# Altium PCB Car-PCB1.PcbDoc (part 1 of 4)
Units mil, origin at the board's own origin, x right, y up, seen from the top; angles counter-clockwise.
Board outline 2206 x 4474.17 mil, 4 copper layers (L1_Top, L2_GND, L3_PWR, L4_BOT), stack 60.912 mil thick; 163 components, 139 nets, 610 pads, 297 vias.
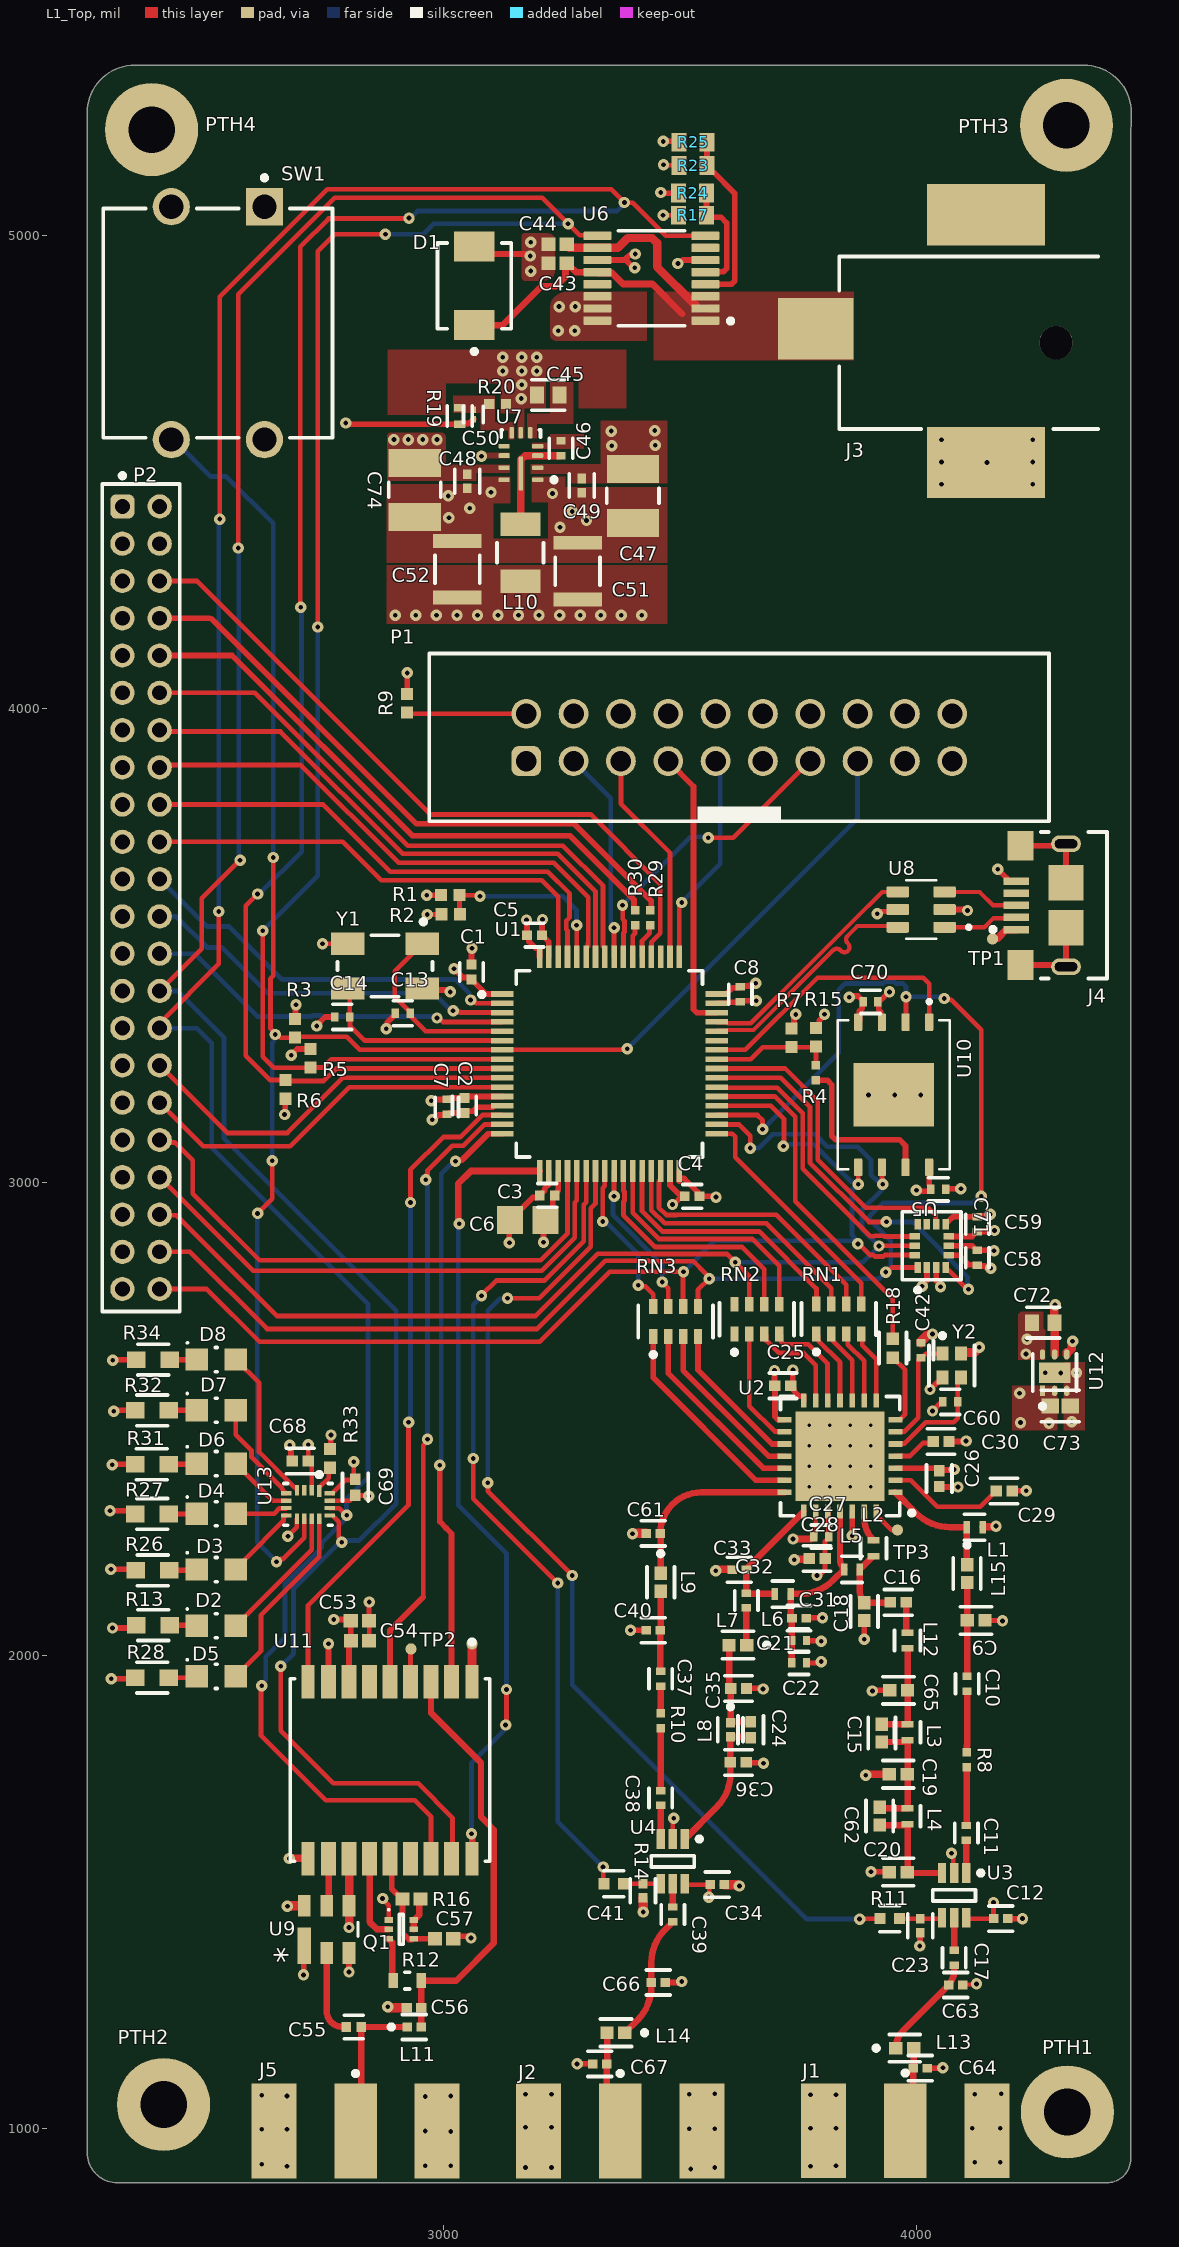
[diagram p0: L1_Top view]
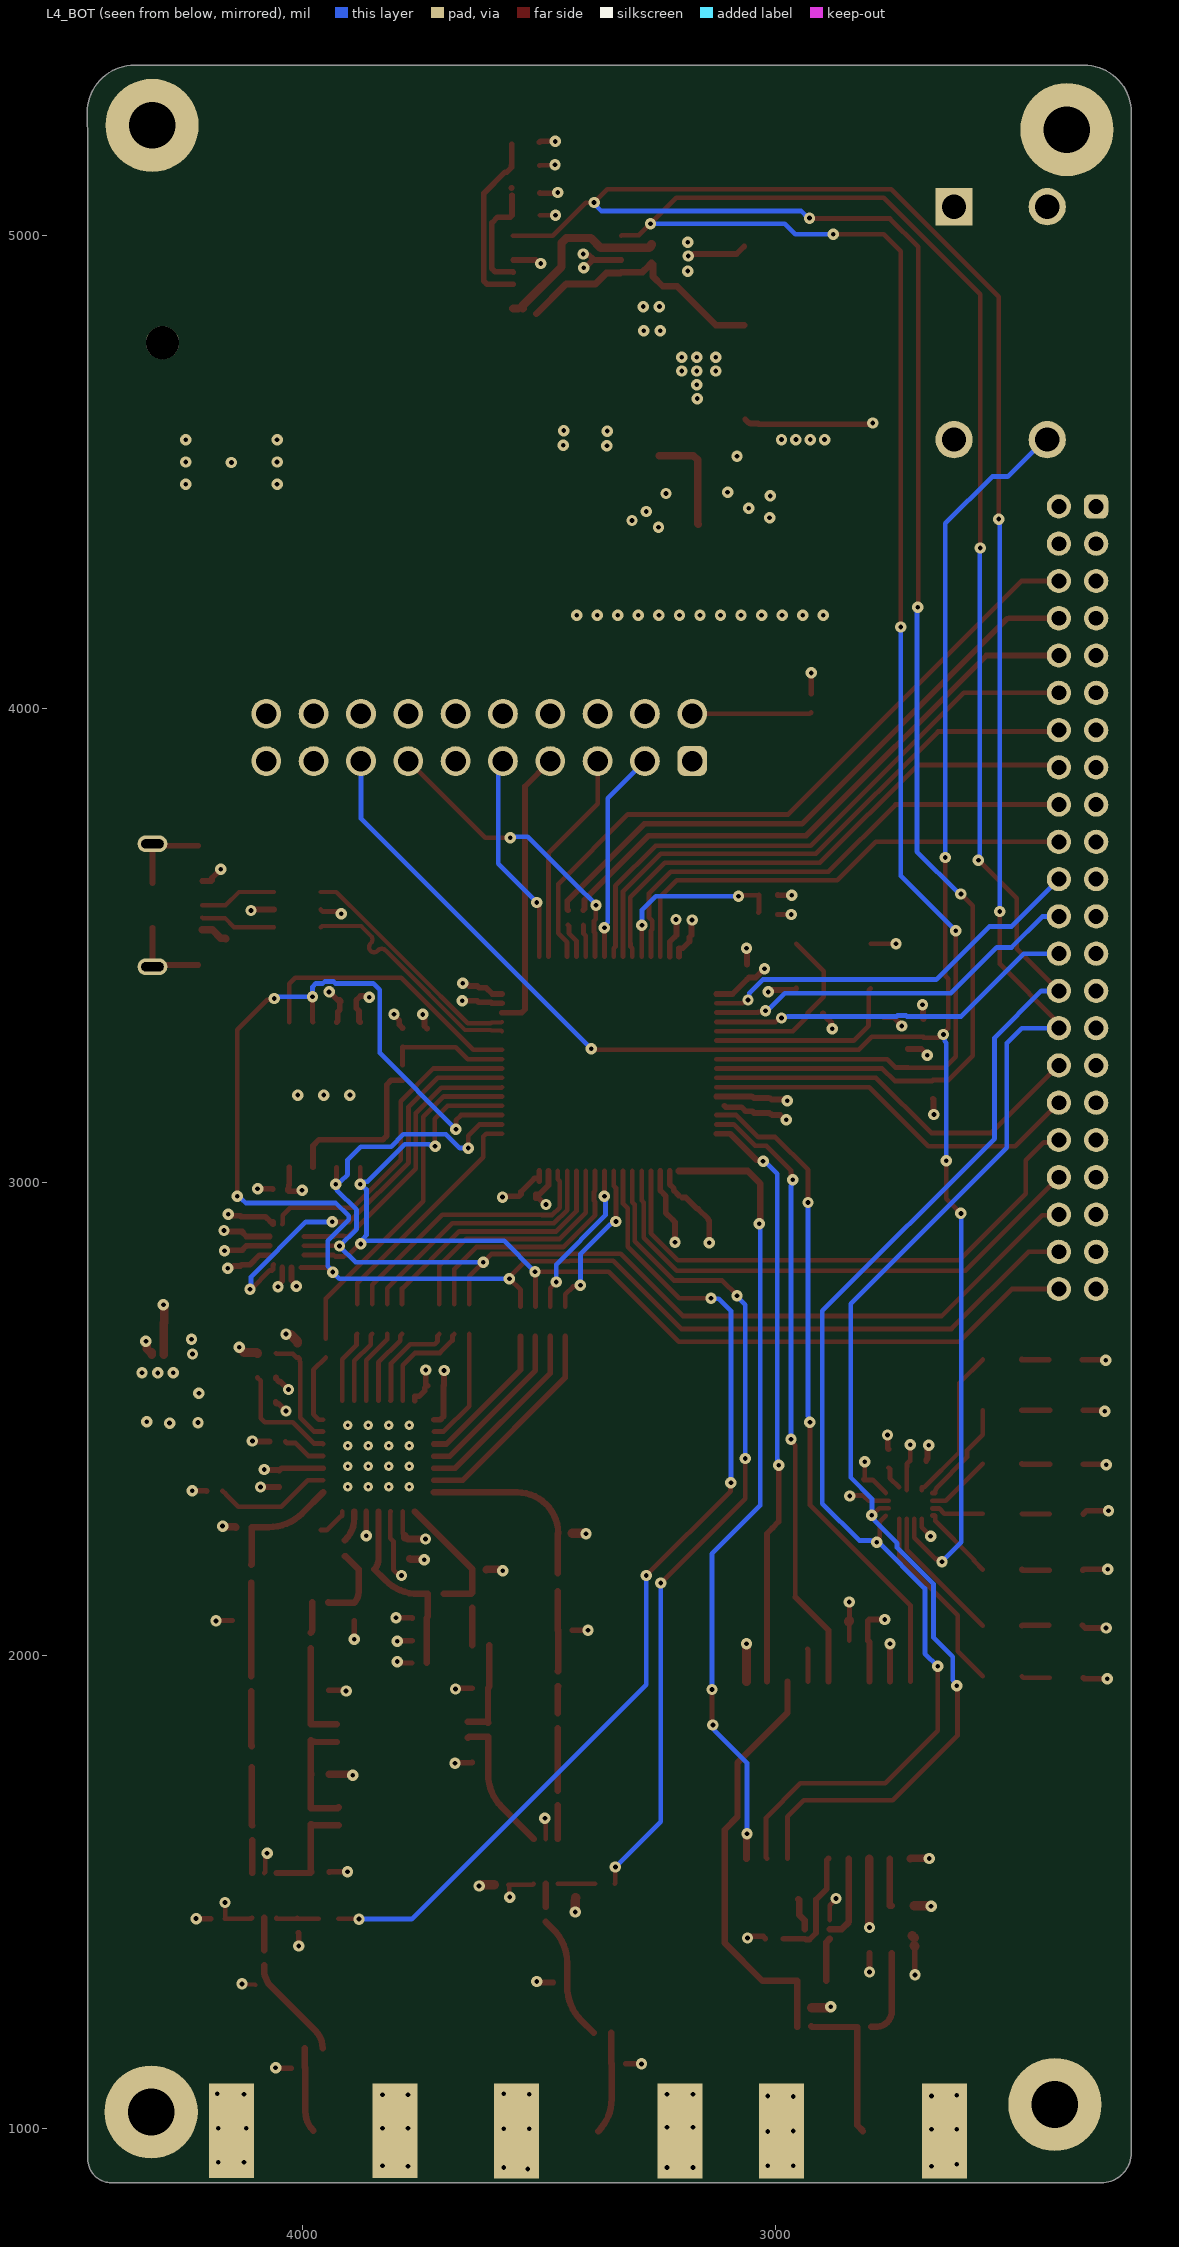
[diagram p1: L4_BOT view, seen from below]
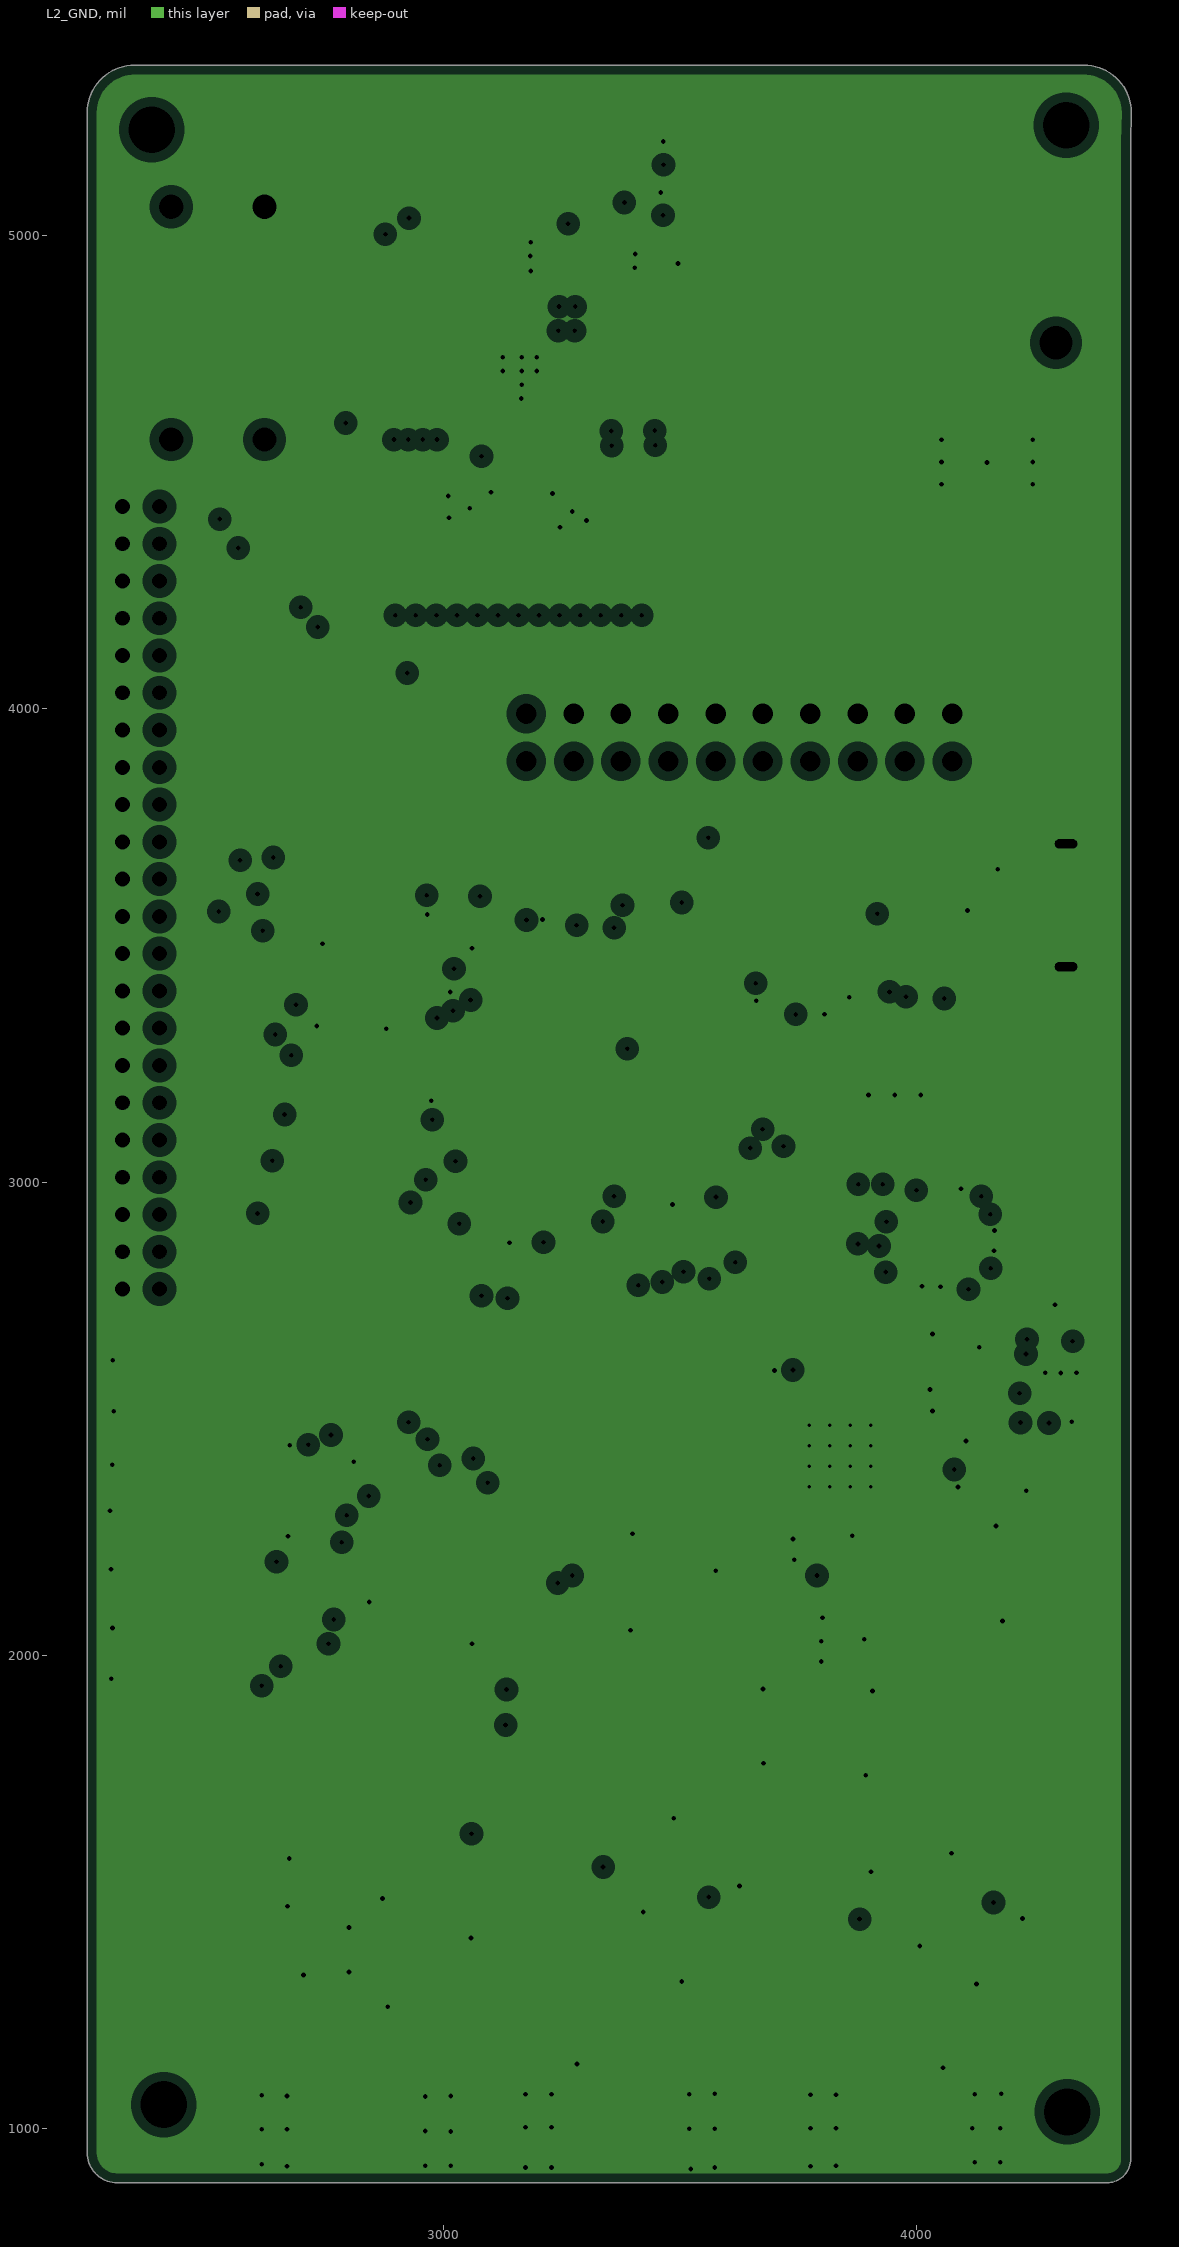
[diagram p2: L2_GND, clearances drawn from the general rule]
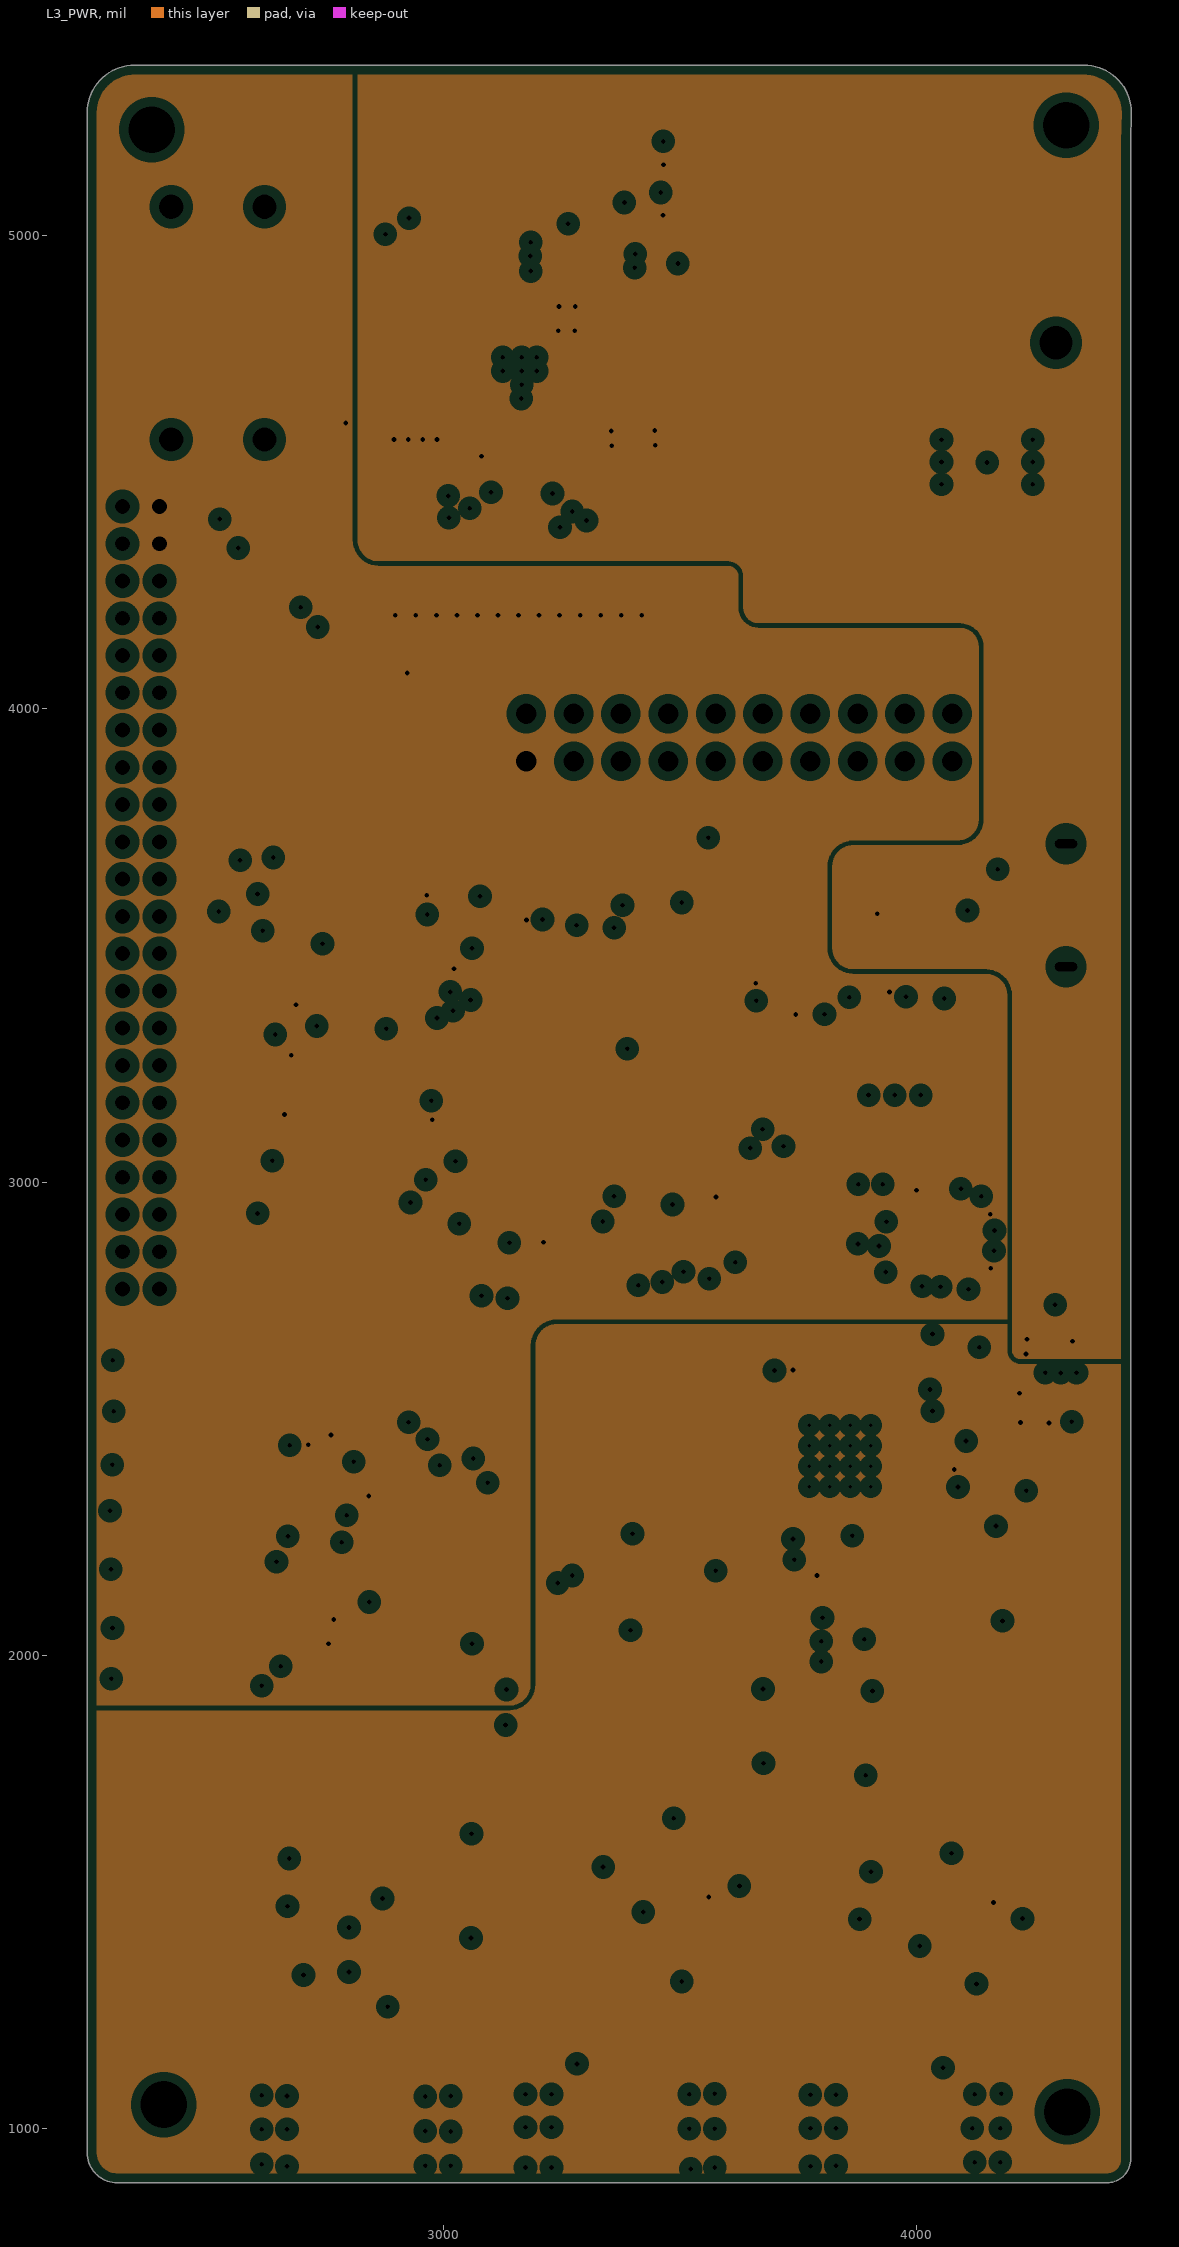
[diagram p3: L3_PWR, clearances drawn from the general rule]
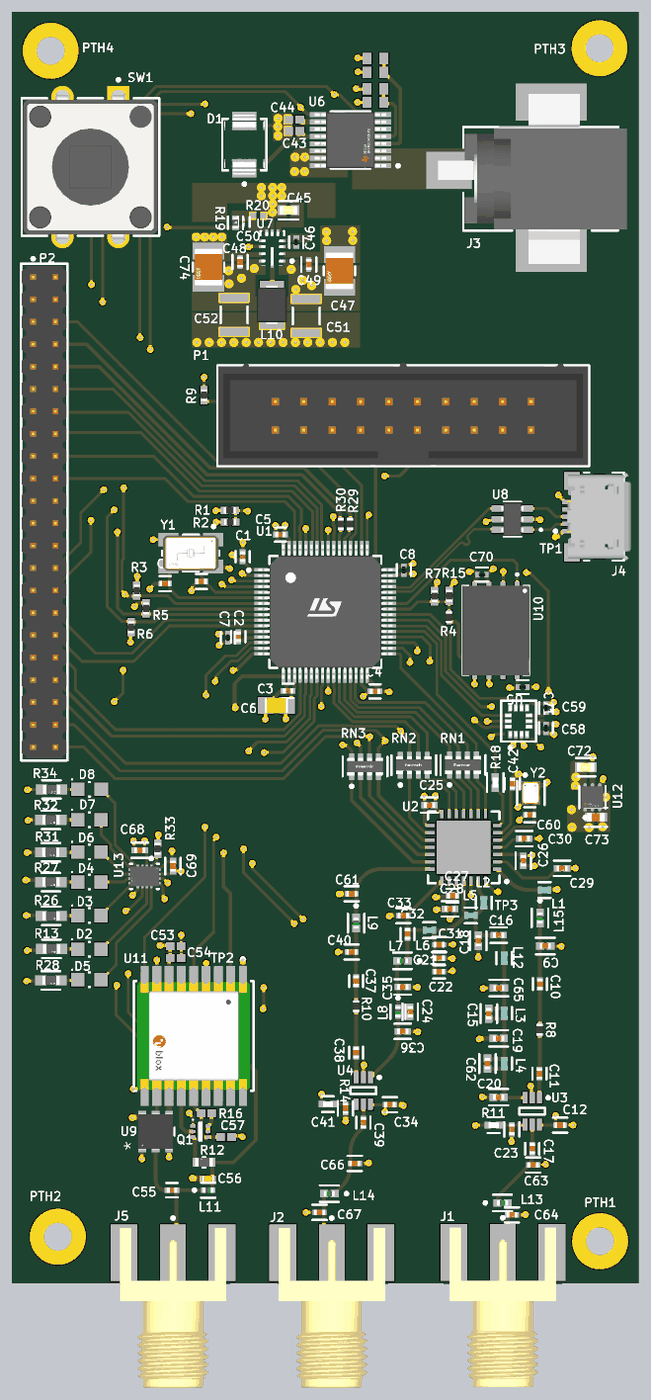
[diagram p6: 3D render of the assembled board from above, using the file's embedded part models]

## Layer stack, top to bottom
Top Solder: solder mask 0.4, Solder Resist, Dk 3.5
L1_Top: signal copper 1.378
Dielectric 2: prepreg 8.2, PP-022, Dk 4.7
L2_GND: plane copper 1.378, net GND
Dielectric 1: core 39, Core-042, Dk 4.6
L3_PWR: plane copper 1.378, net (Multiple Nets)
Dielectric 3: prepreg 8.2, PP-022, Dk 4.7
L4_BOT: signal copper 1.378
Bottom Solder: solder mask 0.4, Solder Resist, Dk 3.5

## Board outline
2311.17,885.83 cw(c2311.19,948.98) 2248.03,949 2248.03,5191 2248,5260 cw(c2348,5260) 2348,5360 4354,5360 cw(c4354,5260) 4454,5260 4452.76,5198 4452.76,935.83 cw(c4402.76,935.82) 4402.76,885.83

## Design rules (kind name [scope] priority, off if disabled: settings)
BoardOutlineClearance [All] p1: gap=20 ignorepadtopadclearanceinfootprint=FALSE
Clearance [All] p1: gap=3 ignorepadtopadclearanceinfootprint=TRUE
DiffPairsRouting DiffPairsRouting_1 [InDifferentialPair('USB')] p1: maxlimit=5 minlimit=5 mostfreqgap=5 toplayer_minwidth=8.9 toplayer_maxwidth=8.9 toplayer_prefwidth=8.9 bottomlayer_minwidth=8.9 bottomlayer_maxwidth=8.9 bottomlayer_prefwidth=8.9 impedanceprofiledriven=TRUE impedanceprofileid={67D3D440-86B2-471F-BC9C-9AFB41C58880} impedanceprofilevalue=90.000000 maxuncoupledlength=500
DiffPairsRouting [All] p2: maxlimit=5 minlimit=5 mostfreqgap=5 toplayer_minwidth=8.9 toplayer_maxwidth=8.9 toplayer_prefwidth=8.9 bottomlayer_minwidth=8.9 bottomlayer_maxwidth=8.9 bottomlayer_prefwidth=8.9 impedanceprofiledriven=TRUE impedanceprofileid={67D3D440-86B2-471F-BC9C-9AFB41C58880} impedanceprofilevalue=90.000000 maxuncoupledlength=500
Height [All] p1 off: minheight=0 maxheight=1000 prefheight=500
MatchedLengths MatchedLengths_1 [InNetClass('USB-1')] p1: tolerance=0.25 checknetsindiffpair=FALSE checkdiffpairvsdiffpair=TRUE checkxsignals=TRUE checkothers=TRUE
MinimumSolderMaskSliver [All] p1: minsoldermaskwidth=5.75
PlaneClearance [All] p1: clearance=20
PlaneConnect [All] p1: planeconnectstyle=Direct reliefexpansion=20 reliefentries=4 reliefconductorwidth=10 reliefairgap=10
PolygonConnect [All] p1: connectstyle=Direct reliefconductorwidth=10 reliefentries=4 polygonreliefangle="90 Angle" airgapwidth=10
RoutingVias [All] p1: holewidth=10 width=24 viastyle="Through Hole" minholewidth=10 minwidth=24 maxholewidth=10 maxwidth=24
SolderMaskExpansion [All] p1: expansion=4 istentingtop=FALSE
SupplyNets "Schematic Supply Nets" [InNet('+3V3')] p1: voltage=0.000
SupplyNets "Schematic Supply Nets_6" [InNet('+3V3_RF')] p2: voltage=0.000
SupplyNets "Schematic Supply Nets_5" [InNet('PWR_JACK')] p3: voltage=0.000
SupplyNets "Schematic Supply Nets_4" [InNet('+5V')] p4: voltage=0.000
SupplyNets "Schematic Supply Nets_3" [InNet('VCC_RF')] p5: voltage=0.000
SupplyNets "Schematic Supply Nets_1" [InNet('GND')] p6: voltage=0.000
Width LoRa [InNetClass('50ohm')] p1: maxlimit=13.64 minlimit=13.64 preferedwidth=13.64 impedanceprofiledriven=TRUE impedanceprofileid={B11F73B4-7360-41F1-84F0-BF905DB8C13B} impedanceprofilevalue=50.000000 minimp=50.000000 maximp=50.000000 favimp=50.000000
Width [All] p2: maxlimit=20 minlimit=8 preferedwidth=10 minimp=50.000000 maximp=50.000000 favimp=50.000000
25 further rules are at their usual default settings.

## Classes and differential pairs
net class USB90: NetJ4_2 NetJ4_3
net class 50ohm: NetC9_1 NetC10_2 NetC11_1 NetC11_2 NetC15_1 NetC15_2 NetC16_1 NetC16_2 NetC17_1 NetC17_2 NetC20_1 NetC21_1 NetC24_1 NetC24_2 NetC32_1 NetC32_2 NetC37_1 NetC37_2 NetC38_1 NetC38_2 NetC39_1 NetC39_2 NetC55_1 NetC55_2 NetC61_1 NetC64_1 NetC67_1 NetL1_2 NetL2_1 NetU9_5
net class N000-1_[2..1]: N000-1_1 N000-1_2
net class GPIO_[7..0]: GPIO_0 GPIO_1 GPIO_2 GPIO_3 GPIO_4 GPIO_5 GPIO_6 GPIO_7
component class USB: J4 PTH1 PTH2 PTH3 PTH4 TP1 U8
component class Regulator: C45 C46 C47 C48 C49 C50 C51 C52 C72 C73 C74 D5 L10 R19 R20 R28 U7 U12
component class PMON: C43 C44 D1 D4 J3 R17 R23 R24 R25 R27 U6
component class MCU: C1 C2 C3 C4 C5 C6 C7 C8 C13 C14 C68 C69 P1 R1 R2 R3 R5 R6 R9 R33 SW1 U1 U13 Y1
component class LoRa_XCVR: C9 C10 C11 C12 C15 C16 C17 C18 C19 C20 C21 C22 C23 C24 C25 C26 C27 C28 C29 C30 C31 C32 C33 C34 C35 C36 C37 C38 C39 C40 C41 C42 C60 C61 C62 C63 C64 C65 C66 C67 D3 J1 J2 L1 L2 L3 L4 L5 L6 L7 L8 L9 L12 L13 L14 L15 R8 R10 R11 R14 R18 R26 RN1 RN2 RN3 TP3 U2 U3 U4 Y2
component class IMU: C58 C59 D7 R32 U10
component class Header: D8 P2 R29 R30 R34
component class GPS: C53 C54 C55 C56 C57 D6 J5 L11 Q1 R12 R16 R31 TP2 U9 U11
component class Flash: C70 C71 D2 R4 R7 R13 R15 U5
differential pair USB: +USB_P -USB_N

## Components (designator, comment, footprint, x,y, rotation, side; value= is the part's Value field where it differs from the comment)
C1 "100nF" FP-C0402-BB-MFG 3060,3444 r90 top value="0.10 μF"
C2 "100nF" FP-C0402-BB-MFG 3045,3162 r90 top value="0.10 μF"
C3 "100nF" FP-C0402-BB-MFG 3220,2972 r180 top value="0.10 μF"
C4 "100nF" FP-C0402-BB-MFG 3526,2970 r180 top value="0.10 μF"
C5 "100nF" FP-C0402-BB-MFG 3193,3522 r0 top value="0.10 μF"
C6 "4.7uF" CAPC2013X135X45LL10T25 3179,2920 r0 top
C7 "1uF" FP-GRM15-MFG 3008,3159 r270 top value=0.10μF
C8 "1uF" FP-GRM15-MFG 3628,3397 r90 top value=0.10μF
C9 "6p8F" FP-GJM155-0_05-IPC_A 4126,2074 r0 top
C10 "47pF" FP-GJM155-0_05-MFG 4107,1940 r270 top
C11 "47pF" FP-GJM155-0_05-MFG 4105.32,1625 r270 top
C12 "1nF" FP-GRM155-0_05-IPC_C 4178.15,1443.9 r0 top
C13 "10pF" FP-GRT155-0_05-MFG 2915,3357 r180 top
C14 "10pF" FP-GRT155-0_05-MFG 2786.77,3349.14 r180 top
C15 "2.7pF" FP-GJM155-0_05-IPC_A 3927,1836 r270 top
C16 "18pF" FP-GJM155-0_05-IPC_B 3961.75,2112.2 r0 top
C17 "47pF" FP-GJM155-0_05-MFG 4079.72,1361.22 r270 top
C18 "15pF" FP-GJM155-0_05-IPC_A 3889.76,2092.52 r270 top
C19 "15pF" FP-GJM155-0_05-IPC_A 3961.61,1749.02 r180 top
C20 "6p8F" FP-GJM155-0_05-IPC_A 3961.61,1542.32 r180 top
C21 "47pF" FP-GJM155-0_05-MFG 3751.97,2031.5 r0 top
C22 "47pF" FP-GJM155-0_05-MFG 3751.97,1984.25 r0 top
C23 "1nF" FP-GRM155-0_05-IPC_C 4008,1429 r270 top
C24 "1.2pF" FP-GJM155-0_05-IPC_B 3650,1843 r270 top
C25 "100nF" FP-GRM155-0_05-IPC_B 3718,2570 r180 top
C26 "100nF" FP-GRM155-0_05-IPC_B 4048.23,2373.88 r270 top
C27 "47pF" FP-GJM155-0_05-MFG 3799.21,2250.98 r180 top
C28 "100nF" FP-GRM155-0_05-IPC_B 3790.21,2204.72 r180 top
C29 "100nF" FP-GRM155-0_05-IPC_B 4185.18,2347.44 r0 top
C30 "100nF" FP-GRM155-0_05-IPC_B 4052,2452 r0 top
C31 "10nF" FP-GRM155-0_05-IPC_C 3751.97,2078.74 r0 top
C32 "33pF" FP-GJM155-0_05-MFG 3640.75,2116.14 r270 top
C33 "1.5pF" FP-GJM155-0_05-IPC_C 3625.98,2181.1 r180 top
C34 "1nF" FP-GRM155-0_05-IPC_C 3578.88,1515.75 r0 top
C35 "4p7F" FP-GJM155-0_05-IPC_B 3624.13,1930.29 r0 top
C36 "1.8pF" FP-GJM155-0_05-IPC_B 3623.87,1774 r0 top
C37 "47pF" FP-GJM155-0_05-MFG 3459.65,1950.79 r270 top
C38 "47pF" FP-GJM155-0_05-MFG 3459.65,1698.82 r270 top
C39 "47pF" FP-GJM155-0_05-MFG 3485.24,1452.76 r270 top
C40 "3.3pF" FP-GJM155-0_05-IPC_C 3443.9,2053.15 r180 top
C41 "1nF" FP-GRM155-0_05-IPC_C 3422,1503 r90 top
C42 "10pF" FP-GRT155-0_05-MFG 4009.68,2645.17 r90 top
C43 "100nF" CAPC1005X55X25ML05T10 3242,4942 r0 top
C44 "100nF" CAPC1005X55X25ML05T10 3242,4982 r0 top
C45 "1uF" FP-C0603C105K4PACTU-MFG 3222,4663 r0 top
C46 "100nF" FP-GRM15-MFG 3249,4551 r270 top value=0.10μF
C47 "4.7uF" FP-1210-L_3_3_0_4-W_2_5_0-IPC_B 3401,4450 r270 top
C48 "220nF" FP-GRM155-0_05-IPC_C 3051,4481 r270 top
C49 "220nF" FP-GRM155-0_05-IPC_C 3293,4472 r270 top
C50 "20pF" FP-GJM022-0_02-IPC_B 3064,4621.95 r270 top
C51 "22uF" MURA-1210_H_2.7_L 3284,4291 r270 top
C52 "22uF" MURA-1210_H_2.7_L 3030,4295 r270 top
C53 "100nF" CAPC1005X55X25ML05T10 2824,2073 r0 top
C54 "100nF" CAPC1005X55X25ML05T10 2824.41,2031.5 r0 top
C55 "47pF" FP-C0402-BB-MFG 2811.25,1215 r180 top value="47 pF"
C56 "10nF" CAPC1005X55X25LL05T10 2938.58,1255.91 r0 top
C57 "100nF" CAPC1005X55X25ML05T10 3001.97,1401.57 r0 top
C58 "100nF" FP-GRM15-MFG 4128.57,2840.47 r270 top value=0.10μF
C59 "100nF" FP-GRM15-MFG 4128.57,2911.33 r90 top value=0.10μF
C60 "10pF" FP-GRT155-0_05-MFG 4071.69,2535.92 r180 top
C61 "3.3pF" FP-GJM155-0_05-IPC_C 3443.9,2257.87 r180 top
C62 "2.7pF" FP-GJM155-0_05-IPC_A 3922.24,1660.43 r270 top
C63 "3.3pF" FP-GJM155-0_05-IPC_C 4083.35,1303.65 r0 top
C64 "3.3pF" FP-GJM155-0_05-IPC_C 4008,1128 r0 top
C65 "6p8F" FP-GJM155-0_05-IPC_A 3962.46,1926.18 r180 top
C66 "3.3pF" FP-GJM155-0_05-IPC_C 3454.72,1309.06 r0 top
C67 "3.3pF" FP-GJM155-0_05-IPC_C 3331,1137 r180 top
C68 "100nF" FP-GRM155-0_05-IPC_B 2698.13,2411 r180 top
C69 "100nF" FP-GRM155-0_05-IPC_B 2814.59,2355.34 r90 top
C70 "100nF" FP-GRM15-MFG 3903,3381 r0 top value=0.10μF
C71 "100nF" FP-GRM15-MFG 4046,2985 r0 top value=0.10μF
C72 "1uF" FP-C0603C105K4PACTU-MFG 4268,2703 r0 top
C73 "2.2uF" FP-C1608-080-0_1-IPC_C 4304,2527 r180 top
C74 "4.7uF" FP-1210-L_3_3_0_4-W_2_5_0-IPC_B 2940,4462.91 r270 top
D1 "SMBJ5.0A-TR" FP-SMB-MFG 3066,4894 r90 top
D2 "LTST-C170KGKT" LTST-LTST-C170KGKT-2_V 2520.37,2062.72 r0 top
D3 "LTST-C170KGKT" LTST-LTST-C170KGKT-2_V 2520.37,2181.49 r0 top
D4 "LTST-C170KGKT" LTST-LTST-C170KGKT-2_V 2520.37,2299.39 r0 top
D5 "LTST-C170KGKT" LTST-LTST-C170KGKT-2_V 2520.37,1955.76 r0 top
D6 "LTST-C170KGKT" LTST-LTST-C170KGKT-2_V 2520.37,2405.25 r0 top
D7 "LTST-C170KGKT" LTST-LTST-C170KGKT-2_V 2520.37,2518.12 r0 top
D8 "LTST-C170KGKT" LTST-LTST-C170KGKT-2_V 2520.75,2625.2 r0 top
J1 "142-0701-801" CINC-142-0701-801_V 3976.38,996.06 r270 top
J2 "142-0701-801" CINC-142-0701-801_V 3374.02,995.08 r270 top
J3 "RASM722PTR13X" FP-RASM722PTR13X-MFG 4127.67,4773.65 r90 top
J4 "10118193-0001LF" FCI-10118193-0001LF-5_V 4263,3585 r90 top
J5 "142-0701-801" CINC-142-0701-801_V 2814.96,995.08 r270 top
L1 "18nH" FP-LQW15AN_00-W0_6-0_1-MFG 4123,2271 r180 top
L2 "2.2nH" FP-LQW15AN_00-W0_6-0_1-MFG 3909.45,2226.38 r270 top
L3 "12nH" FP-LQW15AN_00-W0_6-0_1-MFG 3981.3,1837.6 r270 top
L4 "15nH" FP-LQW15AN_00-W0_6-0_1-MFG 3981.3,1660.43 r270 top
L5 "33nH" FP-LQW15AN_00-W0_5-0_1-MFG 3864,2182 r0 top
L6 "33nH" FP-LQW15AN_00-W0_5-0_1-MFG 3717.52,2129.92 r0 top
L7 "10nH" FP-LQG15HH_02-IPC_A 3623,2022 r180 top
L8 "6.2nH" FP-LQG15HH_02-IPC_C 3607,1843 r270 top
L9 "10nH" FP-LQG15HH_02-IPC_A 3459.65,2154.67 r270 top
L10 "CM322522-100KL" BOUR-CM322522_V 3163,4330 r270 top
L11 "27nH" FP-LQG15HH_02-IPC_C 2939,1215 r0 top
L12 "15nH" FP-LQW15AN_00-W0_6-0_1-MFG 3981.3,2031.5 r270 top
L13 "10nH" FP-LQG15HH_02-IPC_A 3975.39,1170.28 r0 top
L14 "10nH" FP-LQG15HH_02-IPC_A 3365.16,1202.76 r180 top
L15 "10nH" FP-LQG15HH_02-IPC_A 4107,2173 r270 top
P1 "61202021621" 61202021621 3625.59,3939.76 r0 top
P2 "62004421121" 62004421121 2361.63,3600.97 r270 top
PTH1 "PTH-M2D5X5" PTH-M2D5X5 4318.9,1035.43 r0 top
PTH2 "PTH-M2D5X5" PTH-M2D5X5 2409.45,1051.18 r0 top
PTH3 "PTH-M2D5X5" PTH-M2D5X5 4317,5233 r0 top
PTH4 "PTH-M2D5X5" PTH-M2D5X5 2384,5224 r0 top
Q1 "NTZD3155CT1G" ONSC-SOT-563-6-463A-01_V 2911.42,1421.26 r0 top
R1 "Resistor 10k +/-1% 0402 63 mW" RESC1005X40X25ML05T05 3015,3607 r180 top value=10k
R2 "Resistor 10k +/-1% 0402 63 mW" RESC1005X40X25ML05T05 3016,3566 r180 top value=0
R3 "Resistor 10k +/-1% 0402 100 mW" RESC1005X40X25ML05T05 2687,3325 r90 top value=10k
R4 "0" RESC1005X40X25LL05T05 3787,3231 r270 top
R5 "Resistor 10k +/-1% 0402 100 mW" RESC1005X40X25ML05T05 2720,3262 r90 top value=4.7K
R6 "Resistor 10k +/-1% 0402 100 mW" RESC1005X40X25ML05T05 2667,3196 r270 top value=4.7K
R7 "Resistor 10k +/-1% 0402 100 mW" RESC1005X40X25ML05T05 3736,3305 r90 top value=10k
R8 "0R" RESC1005X40X25LL05T05 4106.3,1779.53 r270 top
R9 "Resistor 10k +/-1% 0402 63 mW" RESC1005X40X25ML05T05 2924,4012 r90 top value=0
R10 "0R" RESC1005X40X25LL05T05 3460,1862 r270 top
R11 "1k" FP-CRCW0402-e3-MFG 3943.9,1443.9 r0 top
R12 "10R" FP-ESR03-MFG 2924,1313 r0 top
R13 "470" FP-CPF0603-MFG 2387,2064 r180 top value=470Ω
R14 "1k" FP-CRCW0402-e3-MFG 3360.24,1517.72 r0 top
R15 "Resistor 10k +/-1% 0402 100 mW" RESC1005X40X25ML05T05 3787.76,3306.11 r270 top value=0
R16 "100k" RESC1005X40X25ML10T10 2933,1485 r0 top
R17 "10k" RESC1608X55X25ML10T15 3527,5043 r180 top
R18 "100R" FP-CRCW0402-e3-IPC_A 3950,2649.23 r90 top
R19 "100k" FP-CRCW0402-C-e3-MFG 3035,4619 r270 top
R20 "43.2k" RESC1005X40X25NL05T05 3115,4644 r180 top
R23 "10k" RESC1608X55X25ML10T15 3528,5148 r180 top
R24 "0R" RESC1608X55X25ML10T15 3527,5090 r0 top
R25 "0R" RESC1608X55X25ML10T15 3528,5197 r0 top
R26 "470" FP-CPF0603-MFG 2386,2180 r180 top value=470Ω
R27 "470" FP-CPF0603-MFG 2385,2299 r180 top value=470Ω
R28 "470" FP-CPF0603-MFG 2385,1953 r180 top value=470Ω
R29 "0" RESC1005X40X25LL05T05 3438,3559 r270 top
R30 "0" RESC1005X40X25LL05T05 3406,3559 r270 top
R31 "470" FP-CPF0603-MFG 2384.57,2404 r180 top value=470Ω
R32 "470" FP-CPF0603-MFG 2385,2518 r180 top value=470Ω
R33 "Resistor 10k +/-1% 0402 100 mW" RESC1005X40X25ML05T05 2760.83,2416.34 r270 top value=10k
R34 "470" FP-CPF0603-MFG 2387,2625 r180 top value=470Ω
RN1 "100R" FP-EXB38V-MFG 3836,2711 r0 top
RN2 "100R" FP-EXB38V-MFG 3662.76,2710.5 r0 top
RN3 "100R" FP-EXB38V-MFG 3491.25,2705.5 r0 top
SW1 "FSM103" FP-FSM103-MFG 2524,4815 r90 top
TP1 "TPAD6R" TP06R 4161,3514 r0 top
TP2 "TPAD6R" TP06R 2932.09,2013.78 r0 top
TP3 "TPAD6R" TP06R 3960,2265 r90 top
U1 "STM32L476RGT6TR" FP-LQFP64-5W-MFG 3351.4,3250 r0 top
U2 "SX1276IMLTRT" SMTC-QFN-28_V 3838.58,2421.26 r180 top
U3 "4259-63" PERE-SC-70-6_M 4079.72,1493.11 r270 top
U4 "4259-63" PERE-SC-70-6_M 3485.24,1564.96 r270 top
U5 "" SON127P600X800X80-9N 3952,3184.65 r270 top
U6 "INA260AIPWR" FP-PW0016A-MFG 3440,4910 r180 top
U7 "LMR36015BRNXT" FP-RNX0012B-MFG 3164.32,4528.38 r180 top
U8 "USBLC6-2SC6" SOT95P280X145-6N 4010,3576 r180 top
U9 "B39162B3913U410" B39162B3913U410_QUA 2753.94,1421.26 r90 top
U10 "LSM6DSOXTR" FP-LGA-14L-DM00249496-MFG 4032.11,2865.57 r90 top
U11 "MAX-M10S-00B" FP-MAX-M10S-00B-MFG 2887.8,1757.87 r270 top
U12 "TLV76733DRVR" FP-DRV0006A-IPC_C 4292,2597.51 r90 top
U13 "FXL6408UMX" FP-523BF-MFG 2714.57,2319.15 r270 top
Y1 "ABM3B-16.000MHZ-10-B-1-U-T" FP-ABM3B-MFG 2877.32,3456.59 r180 top
Y2 "32MHz" FP-ABM11-MFG 4074.65,2612.69 r270 top

## Footprints (in the part's own frame and the unit in brackets; to place one, negate y for a bottom-side part, rotate by r counter-clockwise, add the part's x,y. Pads: shape width x height; smd on the part's side, far side on the other; paste and mask are expansions set on the pad)
61202021621 [mm] "20 pins, straight, gold plating"
  rrect50% 1.6x1.6 hole 1.1: 1(-11.43,-1.27)
  round 1.6 hole 1.1: 2(-11.43,1.27) 3(-8.89,-1.27) 4(-8.89,1.27) 5(-6.35,-1.27) 6(-6.35,1.27) 7(-3.81,-1.27) 8(-3.81,1.27) 9(-1.27,-1.27) 10(-1.27,1.27) 11(1.27,-1.27) 12(1.27,1.27) 13(3.81,-1.27) 14(3.81,1.27) 15(6.35,-1.27) 16(6.35,1.27) 17(8.89,-1.27) 18(8.89,1.27) 19(11.43,-1.27) 20(11.43,1.27)
  silkscreen extent -16.63,-4.5 16.63,4.5, body extent -16.53,-4.42 16.53,4.75, height 9.13
62004421121 [mm] "2.00 mm THT Dual Pin Header, 44p"
  rrect50% 1.3x1.3 hole 0.8: 1(-21,-1)
  round 1.3 hole 0.8: 2(-21,1) 3(-19,-1) 4(-19,1) 5(-17,-1) 6(-17,1) 7(-15,-1) 8(-15,1) 9(-13,-1) 10(-13,1) 11(-11,-1) 12(-11,1) 13(-9,-1) 14(-9,1) 15(-7,-1) 16(-7,1) 17(-5,-1) 18(-5,1) 19(-3,-1) 20(-3,1) 21(-1,-1) 22(-1,1) 23(1,-1) 24(1,1) 25(3,-1) 26(3,1) 27(5,-1) 28(5,1) 29(7,-1) 30(7,1) 31(9,-1) 32(9,1) 33(11,-1) 34(11,1) 35(13,-1) 36(13,1) 37(15,-1) 38(15,1) 39(17,-1) 40(17,1) 41(19,-1) 42(19,1) 43(21,-1) 44(21,1)
  silkscreen extent -22.77,-2.07 22.2,2.07, body extent -22,-2 22,2, height 6.05
B39162B3913U410_QUA [mil]
  rect 77x28 smd paste+0 mask+0: 1(-34.5,47.24)
  rect 46x27 smd paste+0 mask+0: 2(-50,0) 3(-50,-47.24) 4(50,-47.24) 5(50,0) 6(50,47.24)
  silkscreen extent -15,-66 15,-66, body extent -63,-61 63,61, height 48
BOUR-CM322522_V [mm] "Inductor, 2-Leads, Body 3.2x2.5mm, Pitch 3.05mm"
  rect 1.25x2.15 smd: 1(-1.525,0) 2(1.525,0)
  silkscreen extent -0.54,-1.25 0.54,1.25, body extent -1.77,-1.35 1.77,1.35, height 2.4
CAPC1005X55X25LL05T10 [mm] "Chip Capacitor, 2-Leads, Body 1.05x0.55mm, IPC High Density"
  rect 0.56x0.52 smd: 1(-0.39,0) 2(0.39,0)
  body extent -0.53,-0.28 0.53,0.28, height 0.55
CAPC1005X55X25ML05T10 [mm] "Chip Capacitor, 2-Leads, Body 1.00x0.50mm, IPC Low Density"
  rect 0.76x0.72 smd: 1(-0.49,0) 2(0.49,0)
  body extent -0.53,-0.28 0.53,0.27, height 0.55
CAPC2013X135X45LL10T25 [mm] "Chip Capacitor, 2-Leads, Body 2.10x1.35mm, IPC High Density"
  rect 1.4x1.5 smd: 1(-0.95,0) 2(0.95,0)
  body extent -1.05,-0.67 1.05,0.67, height 1.35
CINC-142-0701-801_V [mil] "SMA Connector, 5-Leads, Body 14.275x9.525mm"
  rect 200x90 smd: 1(0,0)
  rect 200x95 smd: 2(0,172.5) 3(0,-172.5)
  rect 200x95 smd far side: 4(0,172.5)
  rect 200x95 smd far side mask+4: 5(0,-172.5)
  silkscreen extent -127,-5 -117,5, body extent -87,-187 475,188, height 171
FCI-10118193-0001LF-5_V [mm] "Micro, USB-B, 5-Leads, Body 7.86x5.05mm, Pitch 0.65 mm"
  rect 0.4x1.35 smd: 1(-1.3,1.325) 2(-0.65,1.325) 3(0,1.325) 4(0.65,1.325) 5(1.3,1.325)
  rect 1.6x1.4 smd: 6(-3.2,1.1) 7(3.2,1.1)
  rect 1.9x1.9 smd: 8(-1.2,-1.35) 9(1.2,-1.35)
  oval 0.9x1.6 hole 0.5 slot 1.2 at 90 deg: 10(-3.3,-1.35) 11(3.3,-1.35)
  silkscreen extent -3.93,-3.55 3.93,2.7, body extent -3.93,-4.16 3.93,1.5, height 2.83
FP-523BF-MFG [mm]
  rect 0.663x0.225 smd paste+0 mask+0: 1(-0.718,0.6)
  rect 0.563x0.225 smd paste+0 mask+0: 2(-0.768,0.2) 3(-0.768,-0.2) 4(-0.768,-0.6) 9(0.768,-0.6) 10(0.768,-0.2) 11(0.768,0.2) 12(0.768,0.6)
  rect 0.225x0.563 smd paste+0 mask+0: 5(-0.6,-1.168) 6(-0.2,-1.168) 7(0.2,-1.168) 8(0.6,-1.168) 13(0.6,1.168) 14(0.2,1.168) 15(-0.2,1.168) 16(-0.6,1.168)
  silkscreen extent -1.72,-1.3 1.12,1.3, body extent -1.15,-1.55 1.15,1.55, height 0.25
FP-1210-L_3_3_0_4-W_2_5_0-IPC_B [mil]
  rect 59.16x110.4 smd paste+0 mask+0: 1(-57.09,0) 2(57.09,0)
  silkscreen extent -16,-55 16,55, body extent -97,-65 97,65, height 10
FP-ABM3B-MFG [mm]
  rect 1.8x1.2 smd paste+0 mask+0: 1(-2,-1.2) 2(2,-1.2) 3(2,1.2) 4(-2,1.2)
  silkscreen extent -2.55,-2.5 2.55,1.65, body extent -3,-1.9 3,1.9, height 0.25
FP-ABM11-MFG [mm]
  rect 0.75x0.65 smd paste+0 mask+0: 1(-0.65,-0.5) 2(0.65,-0.5) 3(0.65,0.5) 4(-0.65,0.5)
  silkscreen extent -1.72,-1.22 1.07,1.22, body extent -1.17,-0.97 1.17,0.97, height 0.25
FP-C0402-BB-MFG [mm]
  rect 0.52x0.52 smd paste+0 mask+0: 1(-0.4,0) 2(0.4,0)
  silkscreen extent -0.5,-0.64 0.5,0.64, body extent -0.8,-0.4 0.8,0.4, height 0.25
FP-C0603C105K4PACTU-MFG [mm]
  rect 0.75x0.9 smd paste+0 mask+0: 1(-0.6,0) 2(0.6,0)
  silkscreen extent -0.87,-0.82 0.87,0.82, body extent -1.2,-0.6 1.2,0.6, height 0.25
FP-C1608-080-0_1-IPC_C [mil]
  rect 36.66x31.97 smd paste+0 mask+0: 1(-21.28,0) 2(21.28,0)
  silkscreen extent -40,-33 40,33, body extent -44,-22 44,22, height 10
FP-CPF0603-MFG [mm]
  rect 1x0.9 smd paste+0 mask+0: 1(-0.9,0) 2(0.9,0)
  silkscreen extent -0.82,-0.82 0.82,0.82, body extent -1.5,-0.55 1.5,0.55, height 0.25
FP-CRCW0402-C-e3-MFG [mm]
  rect 0.4x0.6 smd paste+0 mask+0: 1(-0.45,0) 2(0.45,0)
  silkscreen extent -0.55,-0.67 0.55,0.67, body extent -0.75,-0.4 0.75,0.4, height 0.25
FP-CRCW0402-e3-IPC_A [mil]
  rect 26.31x26.48 smd paste+0 mask+0: 1(-19.77,0) 2(19.77,0)
  silkscreen extent -33,-29 33,29, body extent -41,-21 41,21, height 10
FP-CRCW0402-e3-MFG [mm]
  rect 0.6x0.6 smd paste+0 mask+0: 1(-0.525,0) 2(0.525,0)
  silkscreen extent -0.53,-0.7 0.53,0.7, body extent -0.92,-0.4 0.92,0.4, height 0.25
FP-DRV0006A-IPC_C [mm]
  rect 0.556x0.292 smd paste+0 mask+0: 1(-0.978,0.65)
  rrect100% 0.556x0.292 smd paste+0 mask+0: 2(-0.978,0) 3(-0.978,-0.65) 4(0.978,-0.65) 5(0.978,0) 6(0.978,0.65)
  rect 1.1x1.7 smd paste-1000 mask+0: 7(0,0)
  silkscreen extent -1.93,-1.17 1,1.17, body extent -1.36,-1.1 1.36,1.1, height 0.25
FP-ESR03-MFG [mm]
  rect 0.5x0.8 smd paste+0 mask+0: 1(-0.75,0) 2(0.75,0)
  silkscreen extent -0.13,-0.45 0.13,0.45, body extent -1.1,-0.55 1.1,0.55, height 0.25
FP-EXB38V-MFG [mm]
  rect 0.45x0.8 smd paste+0 mask+0: 1(-1.2,-0.8) 2(-0.4,-0.8) 3(0.4,-0.8) 4(1.2,-0.8) 5(1.2,0.8) 6(0.4,0.8) 7(-0.4,0.8) 8(-1.2,0.8)
  silkscreen extent -2,-1.9 2,0.87, body extent -1.8,-1.3 1.8,1.3, height 0.25
FP-FSM103-MFG [mm]
  rect 2x2 hole 1.3 paste-2539.97 mask+0: 1(6.25,-2.5)
  round 2 hole 1.3 paste-2539.97 mask+0: 2(-6.25,-2.5) 3(6.25,2.5) 4(-6.25,2.5)
  silkscreen extent -6.15,-6.15 7.92,6.15, body extent -7.35,-6.25 7.35,6.25, height 0.25
FP-GJM022-0_02-IPC_B [mil]
  rect 14x10.29 smd paste+0 mask+0: 1(-9.95,0) 2(9.95,0)
  silkscreen extent -17,-21 17,21, body extent -23,-11 23,11, height 10
FP-GJM155-0_05-IPC_A [mil]
  rect 28.16x26.48 smd paste+0 mask+0: 1(-18.84,0) 2(18.84,0)
  silkscreen extent -33,-29 33,29, body extent -41,-21 41,21, height 10
FP-GJM155-0_05-IPC_B [mil]
  rect 24.23x22.54 smd paste+0 mask+0: 1(-16.87,0) 2(16.87,0)
  silkscreen extent -29,-27 29,27, body extent -35,-17 35,17, height 10
FP-GJM155-0_05-IPC_C [mil]
  rect 20.29x18.6 smd paste+0 mask+0: 1(-14.9,0) 2(14.9,0)
  silkscreen extent -25,-27 25,27, body extent -29,-15 29,15, height 10
FP-GJM155-0_05-MFG [mm]
  rect 0.4x0.5 smd paste+0 mask+0: 1(-0.4,0) 2(0.4,0)
  silkscreen extent -0.53,-0.63 0.53,0.63, body extent -0.7,-0.38 0.7,0.38, height 0.25
FP-GRM15-MFG [mm]
  rect 0.4x0.5 smd paste+0 mask+0: 1(-0.4,0) 2(0.4,0)
  silkscreen extent -0.53,-0.63 0.53,0.63, body extent -0.7,-0.38 0.7,0.38, height 0.25
FP-GRM155-0_05-IPC_B [mil]
  rect 24.23x22.54 smd paste+0 mask+0: 1(-16.87,0) 2(16.87,0)
  silkscreen extent -29,-27 29,27, body extent -35,-17 35,17, height 10
FP-GRM155-0_05-IPC_C [mil]
  rect 20.29x18.6 smd paste+0 mask+0: 1(-14.9,0) 2(14.9,0)
  silkscreen extent -25,-27 25,27, body extent -29,-15 29,15, height 10
FP-GRT155-0_05-MFG [mm]
  rect 0.4x0.5 smd paste+0 mask+0: 1(-0.4,0) 2(0.4,0)
  silkscreen extent -0.5,-0.67 0.5,0.67, body extent -0.7,-0.38 0.7,0.38, height 0.25
FP-LGA-14L-DM00249496-MFG [mm]
  rect 0.575x0.35 smd paste+0 mask+0: 1(-1.162,0.75) 2(-1.162,0.25) 3(-1.162,-0.25) 4(-1.162,-0.75) 8(1.162,-0.75) 9(1.162,-0.25) 10(1.162,0.25) 11(1.162,0.75)
  rect 0.35x0.575 smd paste+0 mask+0: 5(-0.5,-0.913) 6(0,-0.913) 7(0.5,-0.913) 12(0.5,0.913) 13(0,0.913) 14(-0.5,0.913)
  silkscreen extent -2.5,-1.58 1.83,1.58, body extent -2.05,-1.8 2.05,1.8, height 0.25
FP-LQFP64-5W-MFG [mm]
  rect 1.2x0.3 smd paste+0 mask+0: 1(-5.75,3.75) 2(-5.75,3.25) 3(-5.75,2.75) 4(-5.75,2.25) 5(-5.75,1.75) 6(-5.75,1.25) 7(-5.75,0.75) 8(-5.75,0.25) 9(-5.75,-0.25) 10(-5.75,-0.75) 11(-5.75,-1.25) 12(-5.75,-1.75) 13(-5.75,-2.25) 14(-5.75,-2.75) 15(-5.75,-3.25) 16(-5.75,-3.75) 33(5.75,-3.75) 34(5.75,-3.25) 35(5.75,-2.75) 36(5.75,-2.25) 37(5.75,-1.75) 38(5.75,-1.25) 39(5.75,-0.75) 40(5.75,-0.25) 41(5.75,0.25) 42(5.75,0.75) 43(5.75,1.25) 44(5.75,1.75) 45(5.75,2.25) 46(5.75,2.75) 47(5.75,3.25) 48(5.75,3.75)
  rect 0.3x1.2 smd paste+0 mask+0: 17(-3.75,-5.75) 18(-3.25,-5.75) 19(-2.75,-5.75) 20(-2.25,-5.75) 21(-1.75,-5.75) 22(-1.25,-5.75) 23(-0.75,-5.75) 24(-0.25,-5.75) 25(0.25,-5.75) 26(0.75,-5.75) 27(1.25,-5.75) 28(1.75,-5.75) 29(2.25,-5.75) 30(2.75,-5.75) 31(3.25,-5.75) 32(3.75,-5.75) 49(3.75,5.75) 50(3.25,5.75) 51(2.75,5.75) 52(2.25,5.75) 53(1.75,5.75) 54(1.25,5.75) 55(0.75,5.75) 56(0.25,5.75) 57(-0.25,5.75) 58(-0.75,5.75) 59(-1.25,5.75) 60(-1.75,5.75) 61(-2.25,5.75) 62(-2.75,5.75) 63(-3.25,5.75) 64(-3.75,5.75)
  silkscreen extent -6.97,-5 5,5, body extent -6.45,-6.45 6.45,6.45, height 0.25
FP-LQG15HH_02-IPC_A [mil]
  rect 28.16x26.48 smd paste+0 mask+0: 1(-18.84,0) 2(18.84,0)
  silkscreen extent -65,-29 33,29, body extent -41,-21 41,21, height 10
FP-LQG15HH_02-IPC_C [mil]
  rect 20.29x18.6 smd paste+0 mask+0: 1(-14.9,0) 2(14.9,0)
  silkscreen extent -54,-27 25,27, body extent -29,-15 29,15, height 10
FP-LQW15AN_00-W0_5-0_1-MFG [mm]
  rect 0.35x0.65 smd paste+0 mask+0: 1(-0.425,0) 2(0.425,0)
  silkscreen extent -0.55,-0.71 0.55,0.7, body extent -0.7,-0.43 0.7,0.43, height 0.25
FP-LQW15AN_00-W0_6-0_1-MFG [mm]
  rect 0.35x0.65 smd paste+0 mask+0: 1(-0.425,0) 2(0.425,0)
  silkscreen extent -0.55,-0.7 0.55,0.7, body extent -0.7,-0.45 0.7,0.45, height 0.25
FP-MAX-M10S-00B-MFG [mm]
  rect 1.8x0.7 smd paste-1000 mask+0: 1(-4.75,4.4) 9(-4.75,-4.4) 10(4.75,-4.4) 18(4.75,4.4)
  rect 1.8x0.8 smd paste-1000 mask+0: 2(-4.75,3.3) 3(-4.75,2.2) 4(-4.75,1.1) 5(-4.75,0) 6(-4.75,-1.1) 7(-4.75,-2.2) 8(-4.75,-3.3) 11(4.75,-3.3) 12(4.75,-2.2) 13(4.75,-1.1) 14(4.75,0) 15(4.75,1.1) 16(4.75,2.2) 17(4.75,3.3)
  silkscreen extent -7,-5.35 4.9,5.35, body extent -5.75,-5.45 5.75,5.45, height 0.25
FP-PW0016A-MFG [mm]
  rrect22% 1.5x0.45 smd paste+0 mask+0: 1(-2.9,2.275) 2(-2.9,1.625) 3(-2.9,0.975) 4(-2.9,0.325) 5(-2.9,-0.325) 6(-2.9,-0.975) 7(-2.9,-1.625) 8(-2.9,-2.275) 9(2.9,-2.275) 10(2.9,-1.625) 11(2.9,-0.975) 12(2.9,-0.325) 13(2.9,0.325) 14(2.9,0.975) 15(2.9,1.625) 16(2.9,2.275)
  silkscreen extent -4.38,-2.55 1.78,2.55, body extent -3.75,-2.8 3.75,2.8, height 0.25
FP-RASM722PTR13X-MFG [mm]
  rect 3.3x4.06 smd paste+0 mask+0: 1(0.76,8.65)
  rect 3.81x6.35 smd paste+0 mask+0: 2(-6.43,-0.49)
  rect 3.3x6.35 smd paste+0 mask+0: 3(6.86,-0.49)
  round 1.78 hole 1.78 unplated paste-2539.97 mask+0: ""(0,-4.25)
  silkscreen extent -4.63,-6.5 4.63,7.38, body extent -8.43,-7.48 8.61,10.78, height 0.25
FP-RNX0012B-MFG [mm]
  rrect40% 0.6x0.25 smd paste+0 mask+0: 1(-0.9,1.125) 2(-0.9,0.475) 3(-0.9,-0.175) 4(-0.9,-0.675) 8(0.9,-0.675) 9(0.9,-0.175) 10(0.9,0.475) 11(0.9,1.125)
  rrect40% 0.25x0.6 smd paste+0 mask+0: 5(-0.5,-1.4) 6(0,-1.4) 7(0.5,-1.4)
  rrect40% 0.25x1.825 smd paste-1000 mask+0: 12(0,0.788)
  silkscreen extent -1.9,-1.55 1.05,1.25, body extent -1.3,-1.8 1.3,1.8, height 0.25
FP-SMB-MFG [mm]
  rect 1.62x2.18 smd paste+0 mask+0: 1(-2.11,0) 2(2.11,0)
  silkscreen extent -3.65,-1.97 2.3,1.97, body extent -3.02,-2.07 3.02,2.07, height 0.25
LTST-LTST-C170KGKT-2_V [mm] "SMD, 2-Leads, Body 2.00x1.25mm"
  rect 1.2x1.2 smd: 1(-1.05,0) 2(1.05,0)
  silkscreen extent -1.6,-0.65 0.05,0.95, body extent -1,-0.63 1,0.63, height 1.1
MURA-1210_H_2.7_L [mm] "Chip Capacitor, 2-Leads, Body 3.5x2.7mm, IPC High Density"
  rect 0.75x2.6 smd: 1(-1.525,0) 2(1.525,0)
  silkscreen extent -0.75,-1.2 0.75,1.2, body extent -1.75,-1.35 1.75,1.35, height 2.7
ONSC-SOT-563-6-463A-01_V [mm] "SOT23, 6-Leads, Body 1.6x1.2mm, Pitch 0.5mm"
  rect 0.45x0.3 smd: 1(-0.675,0.5) 2(-0.675,0) 3(-0.675,-0.5) 4(0.675,-0.5) 5(0.675,0) 6(0.675,0.5)
  silkscreen extent -0.72,-0.8 0.1,1.1, body extent -0.6,-0.8 0.6,0.8, height 0.6
PERE-SC-70-6_M [mm] "SOT23, 6-Leads, Body 2.25x1.35mm, Pitch 0.65mm, IPC Low Density"
  rect 1.05x0.45 smd: 1(-1.2,0.65) 2(-1.2,0) 3(-1.2,-0.65) 4(1.2,-0.65) 5(1.2,0) 6(1.2,0.65)
  silkscreen extent -1.32,-1.15 0.3,1.55, body extent -0.67,-1.12 0.67,1.13, height 1.1
PTH-M2D5X5 [mm]
  round 5 hole 2.5: 1(0,0)
RESC1005X40X25LL05T05 [mm] "Chip Resistor, 2-Leads, Body 1.05x0.55mm, IPC High Density"
  rect 0.45x0.45 smd: 1(-0.4,0) 2(0.4,0)
  body extent -0.53,-0.28 0.53,0.28, height 0.4
RESC1005X40X25ML05T05 [mm] "Chip Resistor, 2-Leads, Body 1.05x0.55mm, IPC Low Density"
  rect 0.65x0.65 smd: 1(-0.5,0) 2(0.5,0)
  body extent -0.53,-0.28 0.53,0.28, height 0.4
RESC1005X40X25ML10T10 [mm] "Chip Resistor, 2-Leads, Body 1.00x0.50mm, IPC Low Density"
  rect 0.75x0.7 smd: 1(-0.475,0) 2(0.475,0)
  body extent -0.55,-0.3 0.55,0.3, height 0.4
RESC1005X40X25NL05T05 [mm] "Chip Resistor, 2-Leads, Body 1.00x0.50mm, IPC Medium Density"
  rect 0.55x0.55 smd: 1(-0.45,0) 2(0.45,0)
  body extent -0.53,-0.27 0.53,0.28, height 0.4
RESC1608X55X25ML10T15 [mm] "Chip Resistor, 2-Leads, Body 1.60x0.80mm, IPC Low Density"
  rect 0.8x1 smd: 1(-0.75,0) 2(0.75,0)
  body extent -0.85,-0.45 0.85,0.45, height 0.55
SMTC-QFN-28_V [mm] "QFN, 28-Leads, Body 6.1x6.1mm, Pitch 0.65mm, Thermal Pad 4.8x4.8mm"
  rect 0.75x0.3 smd: 1(-2.975,1.95) 2(-2.975,1.3) 3(-2.975,0.65) 4(-2.975,0) 5(-2.975,-0.65) 6(-2.975,-1.3) 7(-2.975,-1.95) 15(2.975,-1.95) 16(2.975,-1.3) 17(2.975,-0.65) 18(2.975,0) 19(2.975,0.65) 20(2.975,1.3) 21(2.975,1.95)
  rect 0.3x0.75 smd: 8(-1.95,-2.975) 9(-1.3,-2.975) 10(-0.65,-2.975) 11(0,-2.975) 12(0.65,-2.975) 13(1.3,-2.975) 14(1.95,-2.975) 22(1.95,2.975) 23(1.3,2.975) 24(0.65,2.975) 25(0,2.975) 26(-0.65,2.975) 27(-1.3,2.975) 28(-1.95,2.975)
  rect 4.8x4.8 smd: 29(0,0)
  silkscreen extent -3.98,-3.2 3.2,3.2, body extent -3.05,-3.05 3.05,3.05, height 1
SON127P600X800X80-9N [mm]
  rrect25% 0.94x0.44 smd: 1(-3.895,1.905) 2(-3.895,0.635) 3(-3.895,-0.635) 4(-3.895,-1.905) 5(3.895,-1.905) 6(3.895,-0.635) 7(3.895,0.635) 8(3.895,1.905)
  rect 3.4x4.3 smd paste-3: 9(0,0)
  silkscreen extent -5.1,-3 4,3, body extent -4,-3 4,3, height 0.8
SOT95P280X145-6N [mm]
  rrect25% 1.21x0.59 smd: 1(-1.255,0.95) 2(-1.255,0) 3(-1.255,-0.95) 4(1.255,-0.95) 5(1.255,0) 6(1.255,0.95)
  silkscreen extent -2.66,-1.57 0.81,1.57, body extent -1.4,-1.46 1.4,1.46, height 0.4
TP06R [mm] "Testpoint, round, d=0.6mm"
  round 0.6 smd paste-1: 1(0,0)

## Part data
C1 C2 C3 C4 C5: library part CMP-2008-02108-2, "CAP CER 0.1UF 16V X7R 0402", Capacitance="0.10 μF", Manufacturer=Kemet, Manufacturer Part Number=C0402C104K4RACTU, Package=C0402-BB, Temperature="-55°C to +125°C", Temperature Characteristic=X7R, Temperature Coefficient=15%, Temperature Range High=+125°C, Temperature Range Low=-55°C, Tolerance=0.1, Voltage Rating="16 V", Automotive=No, Category=Cap, ComponentLink2Description=Datasheet, ComponentLink2URL=https://content.kemet.com/datasheets/KEM_C1002_X7R_SMD.pdf, Device Class L1="Passive Components", Device Class L2=Capacitors, Device Class L3="Ceramic Capacitors", Digikey Description="CAP CER 0.1UF 16V X7R 0402", Height=0.55mm, Ipc Land Pattern Name=CAPC10050X50, Lead Free=Yes, Material=Ceramic, Mouser Description="Cap Ceramic 0.1uF 16V X7R 10% SMD 0402 125?C Paper T/R - Tape and Reel (Alt: C0402C104K4RAC TU)", Octopart=https://octopart.com/c0402c104k4ractu-kemet-94158, RoHS=TRUE
C6: library part CMP-1662-00015-2, "Chip Capacitor, 4.7 uF, +/- 10%, 16 V, -55 to 85 degC, 0805 (2012 Metric), RoHS, Tape and Reel", Capacitance="4.7 uF", Case Code (Imperial)=0805, Case Code (Metric)=2012, Max Operating Temperature="85 degC", Min Operating Temperature="-55 degC", Package Quantity=3000, PartNumber=GRM21BR61C475KA88L, Tolerance=10%, Type (Capacitors)=X5R, Voltage Rating="16 V", Case\/Package=0805, ComponentLink1Description="Manufacturer URL", ComponentLink1URL=http://www.murata.com/, ComponentLink2Description=Datasheet, ComponentLink2URL=http://search.murata.co.jp/Ceramy/image/img/A01X/G101/ENG/GRM21BR61C475KA88-01.pdf, DatasheetVersion=03/2016, Height="1.25 mm", Length="2 mm", Mount="Surface Mount", Mounting Technology="Surface Mount", PackageDescription="2-Pin Surface Mount Device, Body 2 x 1.25 mm", PackageReference=0805, Packaging="Tape and Reel", Pins=2, Radiation Hardening=No, REACH SVHC="No SVHC", RoHSCompliant=true, Voltage Rating (DC)="16 V", Width="1.25 mm"
C7 C8 C46 C58 C59 C70 C71: library part CMP-2100-03641-2, "CAP CER 0.1UF 16V X7R 0402", Capacitance=0.10μF, Manufacturer=Murata, Manufacturer Part Number=GRM155R71C104KA88D, Package=GRM15, Temperature="-55°C to +125°C", Temperature Characteristic=X7R, Temperature Range High=+125°C, Temperature Range Low=-55°C, Tolerance=10%, Voltage Rating=16Vdc, Category=Cap, ComponentLink2Description=Datasheet, ComponentLink2URL=https://search.murata.co.jp/Ceramy/image/img/A01X/G101/ENG/GRM155R71H471KA01-01A.pdf, Device Class L1="Passive Components", Device Class L2=Capacitors, Device Class L3="Ceramic Capacitors", Digikey Description="CAP CER 0.1UF 16V X7R 0402", Height=0.55mm, Ipc Land Pattern Name=CAPC10050X219, Lead Free=yes, Material=Ceramic, Mouser Description="0402 0.1 uF 16V ±10 % Tolerance X7R SMT Multilayer Ceramic Capacitor", Octopart=https://octopart.com/grm155r71c104ka88d-murata-196880, RoHS=TRUE, Standoff Height=0mm
C9 C20 C65: library part CMP-2008-03772-2, "Multi-Layer Ceramic Capacitor 6.8pF C0G  ±0.1pF 0402 Paper T/R", Capacitance=6.8pF, Case Code (Imperial)=0402, Case Code (Metric)=1005, Dielectric=C0G, Max Operating Temperature=125°C, Min Operating Temperature=-55°C, Package Quantity=10000, Voltage Rating=50V, Case/Package=0402, Depth=0.5mm, Height=0.5mm, Lead Free="Lead Free", Length=1mm, Mount="Surface Mount", Packaging="Tape and Reel", Radiation Hardening=No, Termination=SMD/SMT, Thickness=0.022inch, Voltage Rating (DC)=50V, Width=0.02inch
C10 C11 C17 C21 C22 C27 C37 C38 C39: library part CMP-06035-013708-1, "Multi-Layer Ceramic Capacitor 47pF C0G  ±5% 0402 Paper T/R", Dielectric=C0G, Tolerance=5%, Voltage Rating (DC)=50V, Capacitance=47pF, Length=1mm, Thickness=500um, Width=500um
C12 C23 C34 C41: library part CMP-1034-01633-3, "Chip Multilayer Ceramic Capacitors for General Purpose, 0402, 1000pF, X7R, 15%, 10%, 100V", Case Code (Imperial)=0402, Case Code (Metric)=1005, Dielectric=X7R, Max Operating Temperature=125°C, Min Operating Temperature=-55°C, Package Quantity=10000, Tolerance=10%, Voltage=100V, Capacitance=1nF, Case/Package=0402, Depth=0.5mm, Height=0.5mm, Lead Free="Lead Free", Length=1mm, Material=Ceramic, Mount="Surface Mount", Packaging="Tape and Reel", Radiation Hardening=No, REACH SVHC="No SVHC", Termination=SMD/SMT, Thickness=0.022inch, Voltage Rating=100V, Voltage Rating (DC)=100V, Width=0.5mm
C13 C14 C42 C60: library part CMP-06035-051459-1, "Multi-Layer Ceramic Capacitor 10pF 50V C0G ±5% 0402 Paper T/R"
C15 C62: library part CMP-2008-03840-2, "Multi-Layer Ceramic Capacitor 2.7pF C0G  ±0.1pF 0402 Paper T/R", Case Code (Imperial)=0402, Case Code (Metric)=1005, Dielectric=C0G, Max Operating Temperature=125°C, Min Operating Temperature=-55°C, Package Quantity=10000, Temperature Coefficient=30ppm/°C, Voltage=50V, Capacitance=2.7pF, Case/Package=0402, Depth=0.5mm, Height=0.5mm, Lead Free="Lead Free", Lead Pitch=0.3mm, Length=1mm, Mount="Surface Mount", Number of Pins=2, Packaging="Tape and Reel", Radiation Hardening=No, REACH SVHC="No SVHC", Termination=SMD/SMT, Thickness=0.022inch, Voltage Rating=50V, Voltage Rating (DC)=50V, Width=0.02inch
C16: library part CMP-2008-03807-2, "Multi-Layer Ceramic Capacitor 18pF C0G  ±5% 0402 Paper T/R", Case Code (Imperial)=0402, Case Code (Metric)=1005, Dielectric=C0G, Max Operating Temperature=125°C, Min Operating Temperature=-55°C, Package Quantity=1, Tolerance=5%, Voltage=50V, Capacitance=18pF, Case/Package=0402, Depth=0.5mm, Height=0.5mm, Lead Free="Lead Free", Length=1mm, Mount="Surface Mount", Packaging="Tape and Reel", Radiation Hardening=No, Termination=SMD/SMT, Thickness=0.022inch, Voltage Rating=50V, Voltage Rating (DC)=50V, Width=0.02inch
C18 C19: library part CMP-2008-03804-2, "Multi-Layer Ceramic Capacitor 15pF C0G  ±5% 0402 Paper T/R", Case Code (Imperial)=0402, Case Code (Metric)=1005, Dielectric=C0G, Max Operating Temperature=125°C, Min Operating Temperature=-55°C, Package Quantity=1, Temperature Coefficient=30ppm/°C, Tolerance=5%, Voltage=50V, Capacitance=15pF, Case/Package=0402, Depth=0.5mm, Height=0.5mm, Lead Free="Lead Free", Lead Pitch=0.3mm, Length=1mm, Mount="Surface Mount", Number of Pins=2, Packaging="Tape and Reel", Radiation Hardening=No, REACH SVHC="No SVHC", Termination=SMD/SMT, Thickness=0.022inch, Voltage Rating=50V, Voltage Rating (DC)=50V, Width=0.02inch
C24: library part CMP-2008-03813-2, "Multi-Layer Ceramic Capacitor 1.2pF C0G  ±0.1pF 0402 Paper T/R", Case Code (Imperial)=0402, Case Code (Metric)=1005, Dielectric=C0G, Max Operating Temperature=125°C, Min Operating Temperature=-55°C, Package Quantity=10000, Temperature Coefficient=30ppm/°C, Voltage=50V, Capacitance=1.2pF, Case/Package=0402, Depth=0.5mm, Height=0.5mm, Lead Free="Lead Free", Lead Pitch=0.3mm, Length=1mm, Mount="Surface Mount", Number of Pins=2, Packaging="Tape and Reel", Radiation Hardening=No, REACH SVHC="No SVHC", Termination=SMD/SMT, Thickness=0.022inch, Voltage Rating=50V, Voltage Rating (DC)=50V, Weight=2.3E-05oz, Width=0.5mm
C25 C26 C28 C29 C30 C68 C69: library part CMP-2008-04639-2, "Chip Multilayer Ceramic Capacitors for General Purpose, 0402, 0.10uF, X7R, 15%, 10%, 50V", Case Code (Imperial)=0402, Case Code (Metric)=1005, Dielectric=X7R, Dielectric Material=Ceramic, Max Operating Temperature=125°C, Min Operating Temperature=-55°C, Package Quantity=10000, Tolerance=10%, Voltage=50V, Capacitance=100nF, Case/Package=0402, Depth=0.5mm, Dissipation Factor=0.025%, Height=0.5mm, Lead Free="Lead Free", Length=1mm, Material=Ceramic, Mount="Surface Mount", Packaging="Tape and Reel", REACH SVHC="No SVHC", Resistor Type=Ceramic, Termination=SMD/SMT, Thickness=0.022inch, Voltage Rating=50V, Voltage Rating (DC)=50V, Weight=0.000212oz, Width=0.5mm
C31: library part CMP-2008-04637-5, "Chip Multilayer Ceramic Capacitors for General Purpose, 0402, 10000pF, X7R, 15%, 10%, 50V", Case Code (Imperial)=0402, Case Code (Metric)=1005, Dielectric=X7R, Max Operating Temperature=125°C, Min Operating Temperature=-55°C, Package Quantity=1, Tolerance=10%, Voltage=25V, Voltage Rating=50V, Capacitance=10nF, Case/Package=0402, Depth=0.5mm, Height=0.5mm, Lead Free="Lead Free", Length=1mm, Material=Ceramic, Mount="Surface Mount", Number of Pins=2, Packaging="Tape and Reel", Radiation Hardening=No, REACH SVHC="No SVHC", Termination=SMD/SMT, Thickness=0.022inch, Voltage Rating (DC)=50V, Width=0.02inch
C32: library part CMP-06035-057988-1, "Multi-Layer Ceramic Capacitor 33pF C0G  ±5% 0402 Paper T/R", Dielectric=C0G, Tolerance=5%, Voltage Rating (DC)=50V, Capacitance=33pF, Length=1mm, Thickness=500um, Width=500um
C33: library part CMP-2008-03820-2, "Multi-Layer Ceramic Capacitor 1.5pF C0G  ±0.1pF 0402 Paper T/R", Case Code (Imperial)=0402, Case Code (Metric)=1005, Dielectric=C0G, Max Operating Temperature=125°C, Min Operating Temperature=-55°C, Package Quantity=10000, Temperature Coefficient=30ppm/°C, Voltage=50V, Capacitance=1.5pF, Case/Package=0402, Construction=Flat, Depth=0.5mm, Height=0.5mm, Lead Free="Lead Free", Lead Pitch=0.3mm, Length=1mm, Mount="Surface Mount", Number of Pins=2, Packaging="Tape and Reel", Radiation Hardening=No, REACH SVHC="No SVHC", Series=GJM, Termination=SMD/SMT, Thickness=0.022inch, Voltage Rating=50V, Voltage Rating (DC)=50V, Width=0.5mm
C35: library part CMP-2008-03859-2, "Multi-Layer Ceramic Capacitor 4.7pF C0G  ±0.25pF 0402 Paper T/R", Capacitance=4.7pF, Case Code (Imperial)=0402, Case Code (Metric)=1005, Dielectric=C0G, Max Operating Temperature=125°C, Min Operating Temperature=-55°C, Package Quantity=10000, Temperature Coefficient=30ppm/°C, Voltage=50V, Case/Package=0402, Depth=0.5mm, Height=0.5mm, Lead Free="Lead Free", Lead Pitch=0.3mm, Length=1mm, Mount="Surface Mount", Number of Pins=2, Packaging="Tape and Reel", Radiation Hardening=No, REACH SVHC="No SVHC", Termination=SMD/SMT, Thickness=0.022inch, Voltage Rating=50V, Voltage Rating (DC)=50V, Width=0.02inch
C36: library part CMP-2008-03825-2, "Multi-Layer Ceramic Capacitor 1.8pF C0G  ±0.1pF 0402 Paper T/R", Case Code (Imperial)=0402, Case Code (Metric)=1005, Dielectric=C0G, Max Operating Temperature=125°C, Min Operating Temperature=-55°C, Package Quantity=10000, Voltage=50V, Capacitance=1.8pF, Case/Package=0402, Depth=0.5mm, Height=0.5mm, Lead Free="Lead Free", Lead Pitch=0.3mm, Length=1mm, Mount="Surface Mount", Number of Pins=2, Packaging="Tape and Reel", Radiation Hardening=No, REACH SVHC="No SVHC", Termination=SMD/SMT, Thickness=0.022inch, Voltage Rating=50V, Voltage Rating (DC)=50V, Width=0.5mm
C40 C61 C63 C64 C66 C67: library part CMP-2008-03846-2, "Multi-Layer Ceramic Capacitor 3.3pF C0G  ±0.1pF 0402 Paper T/R", Case Code (Imperial)=0402, Case Code (Metric)=1005, Dielectric=C0G, Max Operating Temperature=125°C, Min Operating Temperature=-55°C, Package Quantity=1, Voltage=50V, Capacitance=3.3pF, Case/Package=0402, Depth=0.5mm, Height=0.5mm, Lead Free="Lead Free", Lead Pitch=0.3mm, Length=1mm, Mount="Surface Mount", Number of Pins=2, Packaging="Tape and Reel", Radiation Hardening=No, REACH SVHC="No SVHC", Termination=SMD/SMT, Thickness=0.022inch, Voltage Rating=50V, Voltage Rating (DC)=50V, Width=0.5mm
C43 C44: library part CMP-2008-04536-1, "GRM155R60J104KA01D", Manufacturer=Murata, Part Number=GRM155R60J104KA01D
C45 C72: library part CMP-2006-02279-2, "CAP CER 1UF 16V X5R 0603", Case Code (Imperial)=0603, Case Code (Metric)=1608, Dielectric=X5R, Dielectric Material=Ceramic, Max Operating Temperature=85°C, Min Operating Temperature=-55°C, Package Quantity=4000, Tolerance=10%, Voltage=16V, Capacitance=1uF, Case/Package=0603, Construction=Flat, Contact Plating=Tin, Depth=0.8mm, Dissipation Factor=5%, Height=0.8mm, Length=1.6mm, Mount="Surface Mount", Packaging="Tape and Reel", Radiation Hardening=No, Termination=SMD/SMT, Voltage Rating=16V, Voltage Rating (DC)=16V, Width=0.8mm
C47 C74: library part CMP-04427-009609-1, "Automotive Ceramic Capacitor, 1210, 4.7uF, 10%, X7R, 15%, 16V", Case Code (Imperial)=1210, Case Code (Metric)=3225, Dielectric=X7R, Max Operating Temperature=125°C, Min Operating Temperature=-55°C, Package Quantity=1, Ratings=AEC-Q200, Tolerance=10%, Voltage Rating=16V, Capacitance=4.7uF, Case/Package=1210, Height=2.29mm, Lead Free="Lead Free", Length=0.126inch, Mount="Surface Mount", Packaging="Tape and Reel", RoHS Compliant=Yes, Series=-, Termination=SMD/SMT, Voltage Rating (DC)=16V, Width=2.5mm
C48 C49: library part CMP-1034-02089-3, "Chip Multilayer Ceramic Capacitors for General Purpose, 0402, 0.22uF, X7R, 15%, 10%, 16V", Case Code (Imperial)=0402, Case Code (Metric)=1005, Dielectric=X7R, Max Operating Temperature=125°C, Min Operating Temperature=-55°C, Package Quantity=1, Tolerance=10%, Voltage=16V, Capacitance=220nF, Case/Package=0402, Depth=0.5mm, Height=0.5mm, Lead Free="Lead Free", Length=1mm, Material=Ceramic, Mount="Surface Mount", Packaging="Tape and Reel", Radiation Hardening=No, REACH SVHC="No SVHC", Termination=SMD/SMT, Thickness=0.022inch, Voltage Rating=16V, Voltage Rating (DC)=16V, Width=0.02inch